# EAGLE board sht21-breakout (EAGLE 7.2.0)
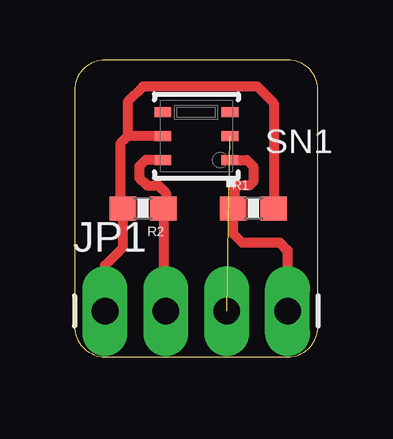
[diagram p0: board, top side]

Size 10.16 x 12.38 mm. Coordinates in mm from the lower left corner, seen from the top.
Outline: 0,11.11 0,1.27 arc90 1.27,0 8.89,0 arc90 10.16,1.27 10.16,11.11 arc90 8.89,12.38 1.27,12.38 arc90 0,11.11
Copper layers (1*16): Top 0.035mm / dielectric 1.5mm / Bottom 0.035mm
Design rules "default": minimum track width 10mil, minimum drill 24mil, track to track 8mil, track to pad 8mil, pad to pad 8mil, via to via 8mil, smd to smd 8mil, copper to edge 40mil, drill to drill 8mil, minimum pad ring 10mil, minimum via ring 8mil, stop-mask expansion 4mil, vias tented up to drill 0mil, thermal gap 10mil

## Footprints (pad centres in the part's own frame; a part is rotated, then mirrored left to right if it is on the bottom)
1X04_LONGPADS = drill 1.118 pad 1.88 long: 1 0,0; 2 2.54,0; 3 5.08,0; 4 7.62,0
0603-RES = smd 1.1 x 1: 1 -0.85,0; 2 0.85,0
DFN6/SHT = smd 0.4 x 0.7: 1 -1,-1.4; 2 0,-1.4; 3 1,-1.4; 4 1,1.4; 5 0,1.4; 6 -1,1.4

## Placement (x,y rotation side)
JP1  [1X04_LONGPADS]  1.27,1.91 0 top
R1  10k  [0603-RES]  7.46,6.19 0 top
R2  10k  [0603-RES]  2.86,6.19 180 top
SN1  SHT21  [DFN6/SHT]  5.08,9.21 90 top

## Library data of the parts
JP1 = SparkFun-Connectors
R1 R2 = SparkFun-Resistors; PROD_ID: RES-00824
SN1 = sensirion

## Nets
GND: JP1.3 SN1.2
SCL: JP1.2 R2.1 SN1.6
SDA: JP1.4 R1.1 SN1.1
VCC: JP1.1 R1.2 R2.2 SN1.5

## Tracks (layer width: path | path; a pad name or v marks a point on that pad's centre or on a via)
GND  (1 unrouted)
SCL
  Top 0.406: 3.68,6.22 R2.1 | R2.1 3.71,2.01 JP1.2 | SN1.6 2.97,8.21 2.7,7.94 2.7,7.46 3.02,7.14 3.49,7.14 3.81,6.83 3.81,6.29 R2.1
SDA
  Top 0.406: 6.48,6.32 R1.1 | R1.1 6.61,5.14 6.99,4.76 8.57,4.76 8.89,4.45 JP1.4 | SN1.1 7.19,8.21 7.46,7.94 7.46,7.3 7.3,7.14 6.83,7.14 6.67,6.99 6.67,6.25 R1.1
VCC
  Top 0.406: JP1.1 1.27,3.81 2.01,4.55 R2.2 1.91,6.29 1.91,8.89 2.22,9.21 | SN1.5 2.22,9.21 | 2.22,9.21 2.22,10.64 2.86,11.27 7.62,11.27 8.31,10.58 R1.2